# Altium PCB Falling_safety_PCB1.PcbDoc
Units mil, origin at the board's own origin, x right, y up, seen from the top; angles counter-clockwise.
Board outline 1574.8 x 1574.8 mil, 2 copper layers (Top Layer, Bottom Layer); 12 components, 7 nets, 29 pads, 0 vias.
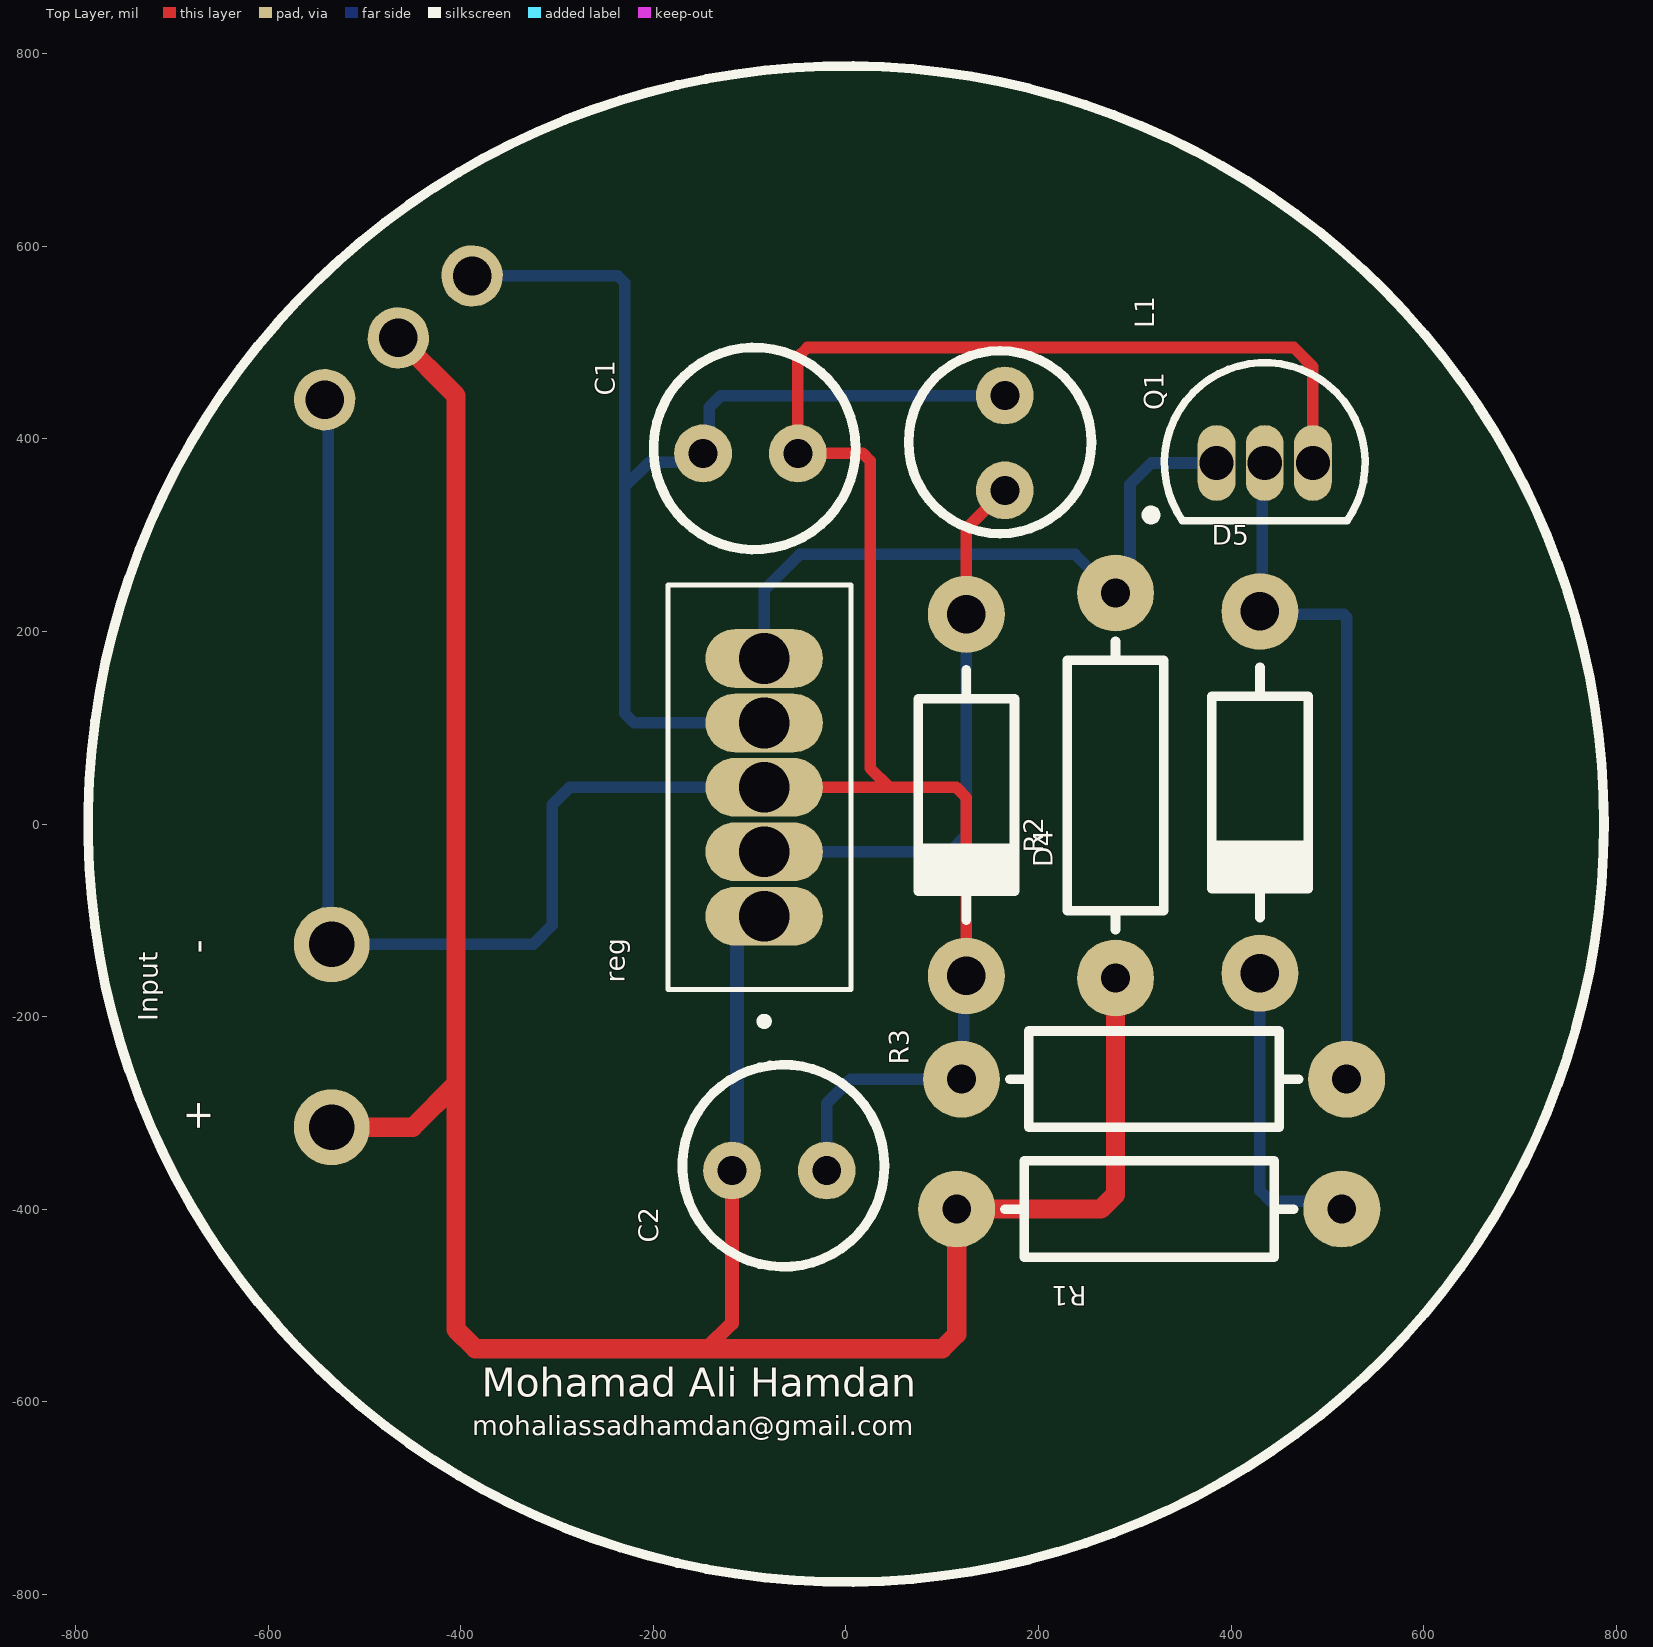
[diagram p0: Top Layer view]
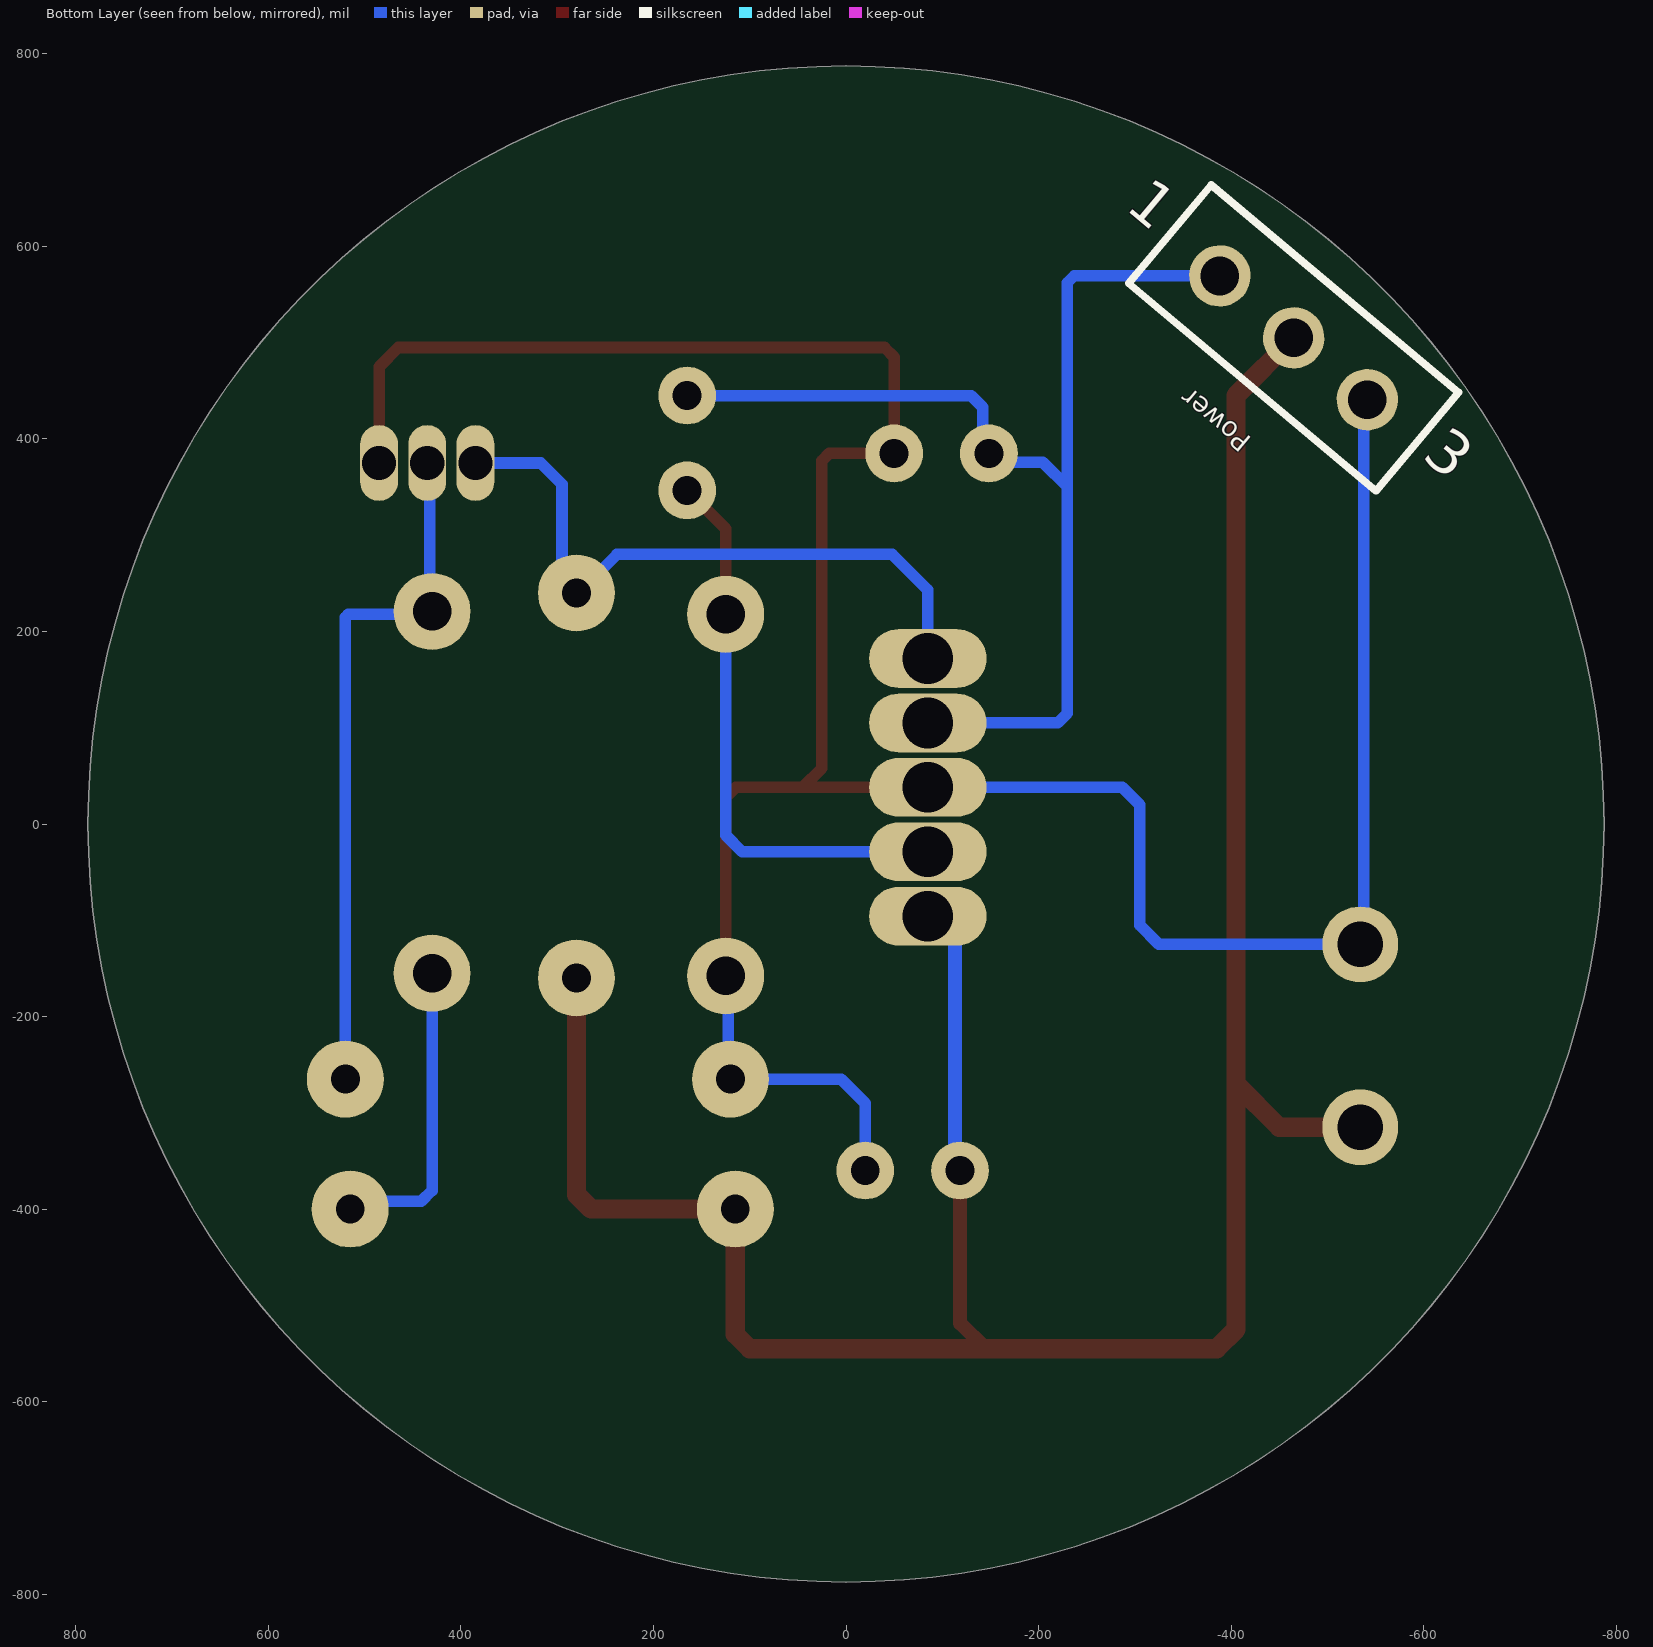
[diagram p1: Bottom Layer view, seen from below]
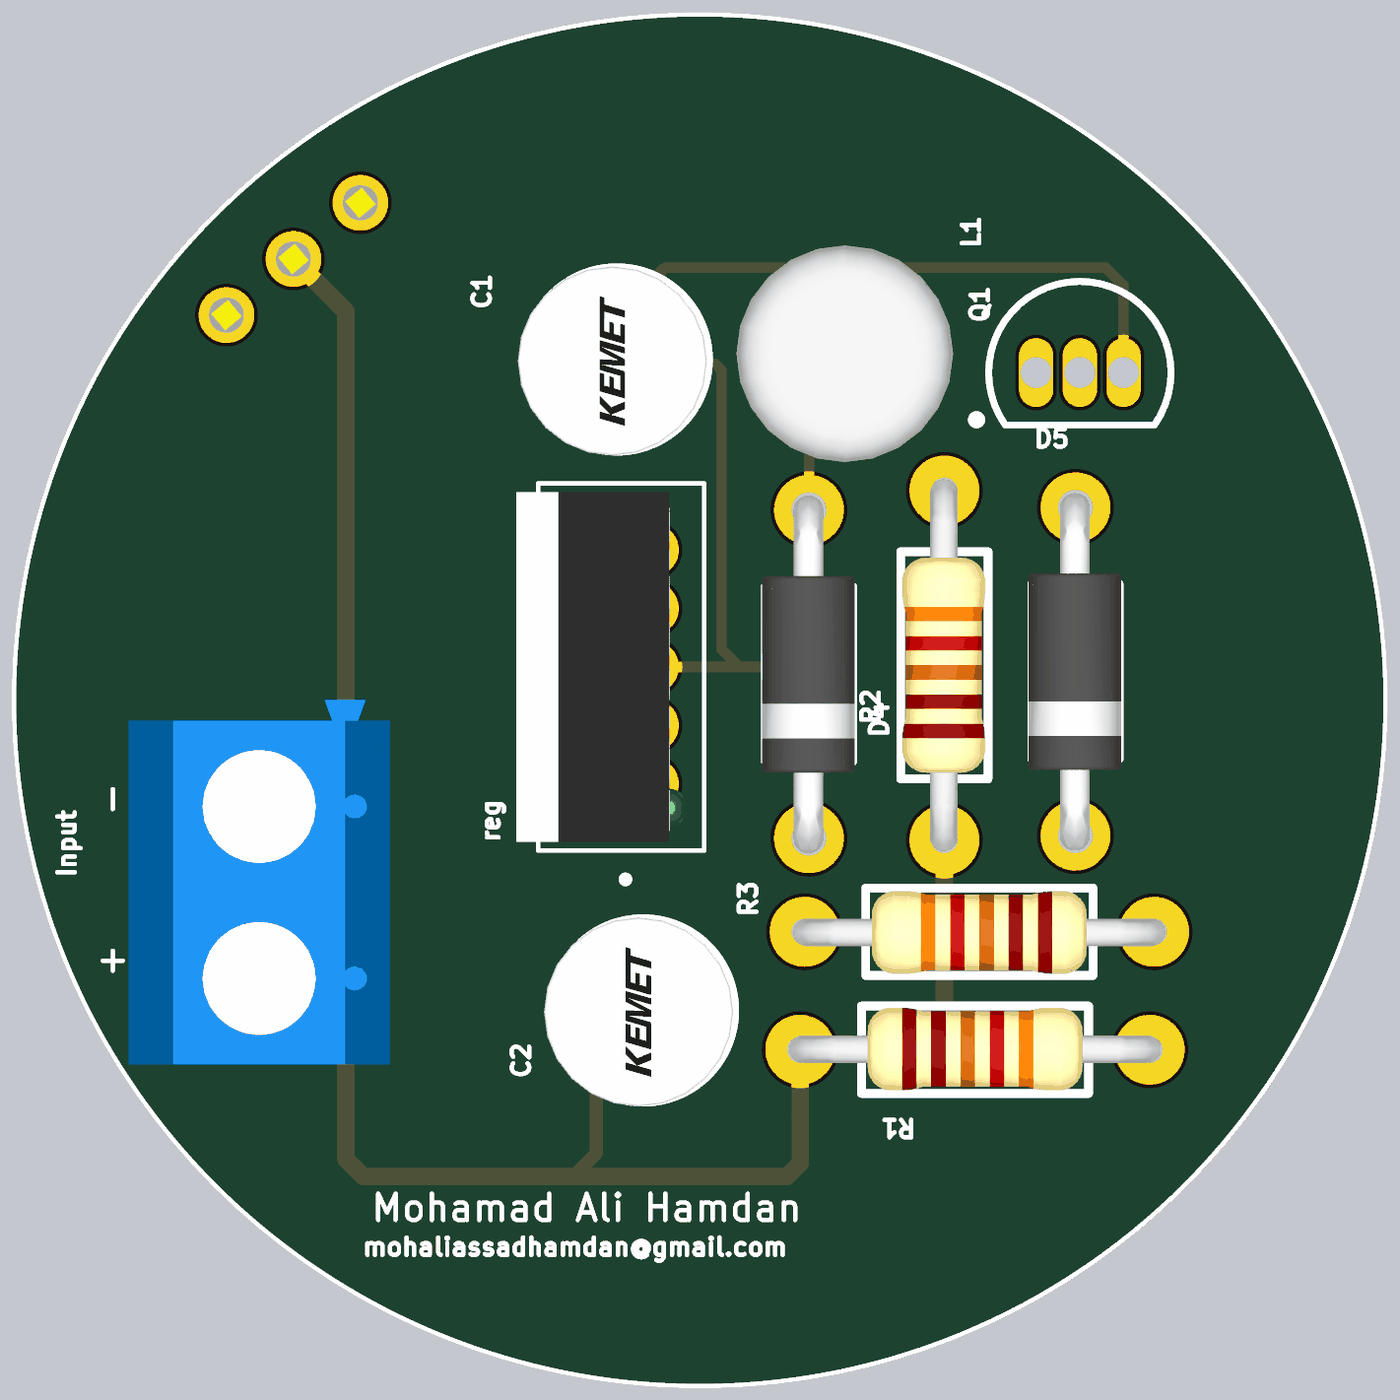
[diagram p2: 3D render of the assembled board from above, using the file's embedded part models]

## Layer stack, top to bottom
Top Solder: solder mask 0.4, Solder Resist, Dk 3.5
Top Layer: signal copper 1.4
Dielectric 1: dielectric 12.6, FR-4, Dk 4.8
Bottom Layer: signal copper 1.4
Bottom Solder: solder mask 0.4, Solder Resist, Dk 3.5

## Board outline
-787.4,0 ccw(c0,0) 0,-787.4 ccw(c0,0) 787.4,0 ccw(c0,0) 0,787.4 ccw(c0,0)

## Design rules (kind name [scope] priority, off if disabled: settings)
Clearance [All] p1: gap=10 ignorepadtopadclearanceinfootprint=FALSE except(0: Arc-Hole Track-Hole SMDPad-Hole THPad-Hole Via-Hole Fill-Hole Poly-Hole Region-Hole Text-Hole)
PolygonConnect [All] p1: connectstyle=Relief reliefconductorwidth=10 reliefentries=4 polygonreliefangle="90 Angle" airgapwidth=10
RoutingVias [All] p1: holewidth=28 width=50 viastyle="Through Hole" minholewidth=28 minwidth=50 maxholewidth=28 maxwidth=50
SolderMaskExpansion [All] p1: expansion=4
Width [All] p1: maxlimit=20 minlimit=10 preferedwidth=10
30 further rules are at their usual default settings.

## Components (designator, comment, footprint, x,y, rotation, side; value= is the part's Value field where it differs from the comment)
C1 "Cap2" Capacitor_polarized_100uF -50,385 r180 top value=1000uF
C2 "Cap2" Capacitor_polarized_100uF -20,-360 r180 top value=100uF
D4 "MBR360" "diode 4007" 75,130 r270 top
D5 "3V BZX79" "diode 4007" 380,132.87 r270 top
Input "Wind generator" blue_connector_2pins -534.21,-125 r270 top
L1 "Inductor" Coil_100uH 165,346.57 r90 top value=100uH
Power "SAMTEC-HTSW-103-07-X-SJ" SAMTEC-HTSW-103-07-X-S -465,505 r220 bottom (schematic designator power)
Q1 "NPN" TO-226-AA 435,375 r270 top
R1 "Res1" resistor 315,-400 r0 top value=33K
R2 "Res1" resistor 280,40 r90 top value=20K
R3 "Res1" resistor 320,-265 r180 top value=10K
reg "LM2576HV" LM2576HV -85,38.07 r90 top

## Footprints (in the part's own frame and the unit in brackets; to place one, negate y for a bottom-side part, rotate by r counter-clockwise, add the part's x,y. Pads: shape width x height; smd on the part's side, far side on the other; paste and mask are expansions set on the pad)
blue_connector_2pins [mm] "blue_connector_2pins"
  round 2 hole 1.2: 1(0,0) 2(4.826,0)
  body extent -3.19,-3.04 7.41,4.56, height 10
Capacitor_polarized_100uF [mil] "Capacitor_polarized_100uF 25V"
  round 60 hole 30: +(98.43,0) -(0,0)
  silkscreen extent -60,-110 150,100, body extent -58,-112 158,105, height 591
Coil_100uH [mil] "coil 100uH as capacitor shape"
  round 60 hole 30: 1(0,0) 2(98.43,0)
  silkscreen extent -45,-90 145,100, body extent -74,-125 250,123, height 472
"diode 4007" [mil]
  round 80 hole 40: 1(-87.87,50) 2(287.87,50)
  silkscreen extent -30,0 230,100, body extent -104,-4 305,102, height 111
LM2576HV [mm]
  oval 1.55x3.1 hole 1.34: 1(-3.4,0) 2(-1.7,0) 3(0,0) 4(1.7,0) 5(3.4,0)
  silkscreen extent -6.27,-2.29 5.34,2.54, body extent -5.08,-1.78 5.08,3.17, height 20
resistor [mil]
  round 80 hole 30: 1(200,0) 2(-200,0)
  silkscreen extent -150,-50 150,50, body extent -213,-46 213,48, height 91
SAMTEC-HTSW-103-07-X-S [mm]
  round 1.62 hole 1.02: 1(-2.54,0) 2(0,0) 3(2.54,0)
  silkscreen extent -4.26,-1.69 4.26,1.69, body extent -3.81,-1.24 3.81,1.24, height 8.38
TO-226-AA [mm] "TO, Flat Index; 3 In-Line, Axial Leads; Body Dia. 4.8mm; Leads 0.55 x 0.51 mm (max)"
  oval 2x1 hole 0.9: 1(0,-1.27) 2(0,0) 3(0,1.27)
  silkscreen extent -2.65,-3.13 1.52,2.65, body extent -2.65,-2.66 1.52,2.66, height 5.33

## Part data
C1 C2: "Capacitor", PackageDescription="Capacitor; 2 Leads", PackageReference=CAPR5-4X5, Published=23-Sep-2002, Publisher="Altium Limited"
D4: library part "Diode 10TQ035", "Schottky Rectifier", ComponentLink1Description="Manufacturer Link", ComponentLink1URL=http://www.irf.com/, ComponentLink2Description=Datasheet, ComponentLink2URL=http://www.irf.com/product-info/datasheets/data/10tq.pdf, DatasheetVersion=PD-2.057B, LatestRevisionDate=17-Jul-2002, LatestRevisionNote="Re-released for DXP Platform.", Note="Terminal 2 is the TAB and is electrically connected to the cathode", PackageDescription="TO, Thru-Hole, Vertical, Heatsink Mounted; 3 In-Line Leads (1 Absent); Pitch 2.54 mm", PackageReference=TO-220AC, PackageVersion=Feb-1998, Published=8-Jun-2000, Publisher="Altium Limited"
D5: library part "D Zener", "Zener Diode", LatestRevisionDate=17-Jul-2002, LatestRevisionNote="Re-released for DXP Platform.", PackageDescription="Diode, Thru-Hole; 2 Leads; 0.7 in Pin Spacing", PackageReference=DIODE-0.7, Published=8-Jun-2000, Publisher="Altium Limited"
Input: library part "Header 2", "Header, 2-Pin", LatestRevisionDate=17-Jul-2002, LatestRevisionNote="Re-released for DXP Platform.", Publisher="Altium Limited"
Q1: "NPN Bipolar Transistor", Code_JEDEC=TO-226-AA, LatestRevisionDate=17-Jul-2002, LatestRevisionNote="Re-released for DXP Platform.", PackageDescription="TO, Flat Index; 3 In-Line, Axial Leads; Body Dia. 4.8mm; Leads 0.55 x 0.51 mm (max)", PackageReference=TO-226-AA, Published=8-Jun-2000, Publisher="Altium Limited"
R1 R2 R3: "Resistor", LatestRevisionDate=17-Jul-2002, LatestRevisionNote="Re-released for DXP Platform.", PackageDescription="Axial Device, Thru-Hole; 2 Leads; 0.3 in Pin Spacing", PackageReference=AXIAL-0.3, Published=8-Jun-2000, Publisher="Altium Limited"
reg: "3A Step-down Adjustable Output Switching Regulator with enable pin"
L1: Code_IEC=1005, Code_JEITA=0402, LatestRevisionDate=29-May-2009, LatestRevisionNote="IPC-7351 Footprint Added.", PackageDescription="Chip Inductor", PackageReference=0402-A, Published=8-Jun-2000, Publisher="Altium Limited"

## Nets (pads, with @x,y where several pads share a name; then routed paths per layer and width w, separated by ;. In a path a pad name is that pad's centre, name@x,y a point inside that pad or via, vN(x,y) a via of type N, cw(c..) or ccw(c..) an arc to the next point about the centre after c; other vN are vias at no path point)
+5V: C1.+ L1.2 Power.1 reg.4 | length 1216.4
  Bottom Layer w12: Power.1 -236.87,569.28 -230,562.41 -230,350.32 ; reg.4 -220,105 -230,115 -230,350.32 ; L1.2 -130,445 -142,433 -142,391.43 C1.+ -157.61,375.82 -204.5,375.82 -230,350.32
GND: C1.- C2.- D4.2 Input.1 Power.3 Q1.3 R3.1 reg.3 | length 3061.3
  Top Layer w12: reg.3 45,38.07 ; D4.2 125,27.48 114.41,38.07 45,38.07 ; Q1.3 485,475 465,495 -40,495 -50,485 C1.- 17.46,385 25,377.46 25,58.07 45,38.07
  Bottom Layer w12: Power.3 -537.91,437.03 -537.91,-121.3 Input.1 -325,-125 -305,-105 -305,20 -286.93,38.07 reg.3 ; C2.- -20,-290 5,-265 R3.1 122.5,-262.5 122.5,-160.37 D4.2
NetD4_1: D4.1 L1.1 reg.2 | length 592
  Top Layer w12: D4.1 125,306.57 L1.1
  Bottom Layer w12: reg.2 107.97,-28.86 125,-11.83 D4.1
NetD5_1: D5.1 Q1.2 R3.2 | length 728.7
  Bottom Layer w12: Q1.2 432.5,372.5 432.5,223.25 D5.1 432.87,217.87 517.13,217.87 520,215 R3.2
NetD5_2: D5.2 R1.1 | length 318.7
  Bottom Layer w12: D5.2 430,-380.79 441.21,-392 507,-392 R1.1
NetQ1_1: Q1.1 R2.1 reg.5 | length 686.3
  Bottom Layer w12: reg.5 -85,243.11 -48.11,280 237.98,280 277.98,240 R2.1 280,258.4 295,273.4 295,352.97 317.03,375 Q1.1
Vturbine: C2.+ Input.2 Power.2 R1.2 R2.2 reg.1 | length 2766.3
  Top Layer w15: -145,-545 -118.43,-518.43 C2.+
  Top Layer w20: Input.2 -450,-315 -405,-270 ; Power.2 -405,445 -405,-270 ; R2.2 280,-385 265,-400 R1.2 115,-530 100,-545 -145,-545 -385,-545 -405,-525 -405,-270
  Bottom Layer w15: C2.+@-128.43,-370 C2.+ -113.22,-354.79 -113.22,-117.05 -91.96,-95.79 reg.1 ; R1.2@107.5,-407.5 R1.2

## Silkscreen, mask and mechanical layers (free items; w line width, h text height)
Top Overlay:
  circle w10: c0,0 r787.4
  text "-" at -660,-135 h30 r90
  text "+" at -660,-320 h30 r90
  text "Mohamad Ali Hamdan" at -378.4,-595 h30
  text "mohaliassadhamdan@gmail.com" at -388.4,-635 h20

## Text inside footprints (layer, text, board x,y; h text height)
Power: Mechanical 40 "2.489" at -183.72,734.5 h15.5 r40; Mechanical 40 "2.540" at -364.08,697.4 h15.5 r40; Mechanical 40 "5.080" at -376.6,716.24 h15.5 r40; Mechanical 40 "7.620" at -366.5,428.03 h15.5 r40; Mechanical 16 "1" at -279.14,628.32 h77.5 r40; Mechanical 16 "3" at -587.69,369.41 h77.5 r40; Bottom Overlay "1" at -279.14,628.32 h77.5 r40; Bottom Overlay "3" at -587.69,369.41 h77.5 r40